# EAGLE board sirvo-breakout-shield (EAGLE 6.4)
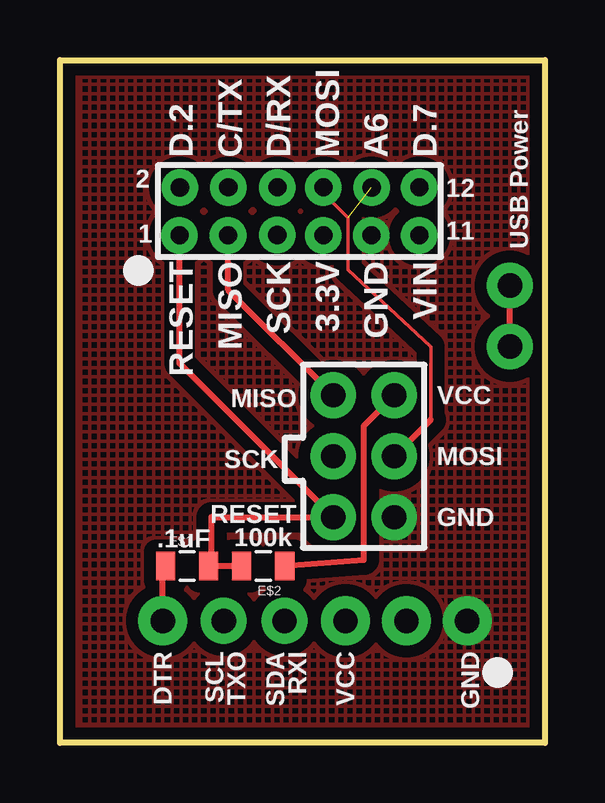
[diagram p0: board, top side]
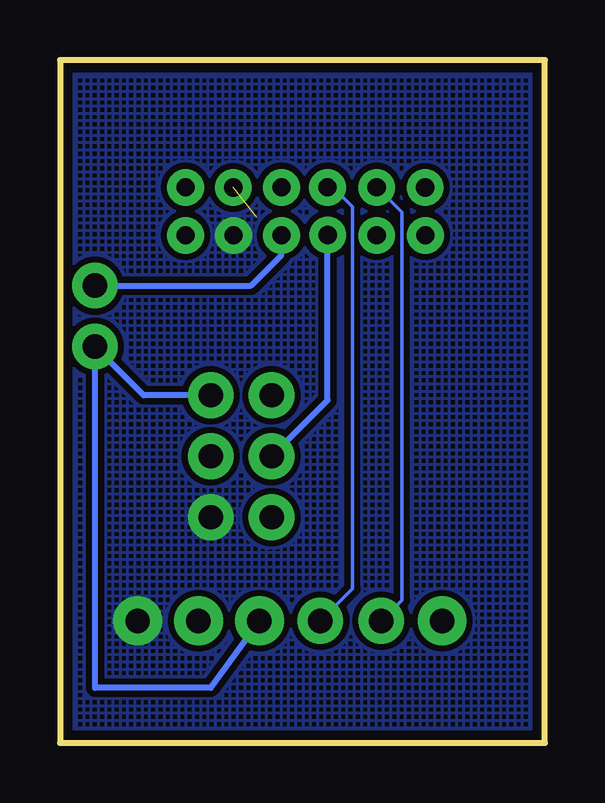
[diagram p1: board, bottom side, seen from below]

Size 20.22 x 28.45 mm. Coordinates in mm from the lower left corner, seen from the top.
Outline: 0,0 0,28.45 20.22,28.45 20.22,0 0,0
Copper layers (1*16): Top 0.0356mm / dielectric 1.5011mm / Bottom 0.0356mm
Design rules "LaenPCBOrder": minimum track width 6mil, minimum drill 13mil, track to track 6mil, track to pad 6mil, pad to pad 6mil, via to via 6mil, smd to smd 6mil, copper to edge 15mil, drill to drill 6mil, minimum pad ring 7mil, minimum via ring 7mil, stop-mask expansion 4mil, vias tented up to drill 0mil, thermal gap 10mil

## Footprints (pad centres in the part's own frame; a part is rotated, then mirrored left to right if it is on the bottom)
0805 = smd 0.8 x 1.2: 1 -0.9,0; 2 0.9,0

## Placement (x,y rotation side)
E$1  [0805]  5.3,7.37 0 top
E$2  [0805]  8.48,7.37 180 top

## Library data of the parts
E$1 E$2 = tekdemo

## Tracks (layer width: path | path; a pad name or v marks a point on that pad's centre or on a via)
3.3V  (via drill 0.76 pad 1.52, 1.02 pad 1.91, 1.02 pad 2.03)
  Top 0.254: v18.76,16.51 v18.76,19.05 | 9.37,7.37 12.67,7.62 12.67,13.21 v13.94,14.48
  Bottom 0.254: v11.91,5.08 13.94,2.29 18.76,2.29 v18.76,16.51 16.73,14.48 v13.94,14.48 | v10.99,21.14 10.99,20.32 12.26,19.05 v18.76,19.05
CTS  (via drill 1.02 pad 2.03)
  other vias: 14.45,5.08
D2  (via drill 0.76 pad 1.52)
  other vias: 5,23.14
D7  (via drill 0.76 pad 1.52)
  other vias: 14.99,23.14
DTR  (via drill 1.02 pad 2.03)
  other vias: 4.29,5.08
GND  (via drill 0.76 pad 1.52, 1.02 pad 1.91, 1.02 pad 2.03)
  other vias: 13.94,9.4 16.99,5.08 12.99,21.14
  pour Bottom (isolate 0.254, hatched): 0.1,28.32 0.1,0.13 20.03,0 20.03,28.19
  pour Top (isolate 0.508, hatched): 0.1,28.45 0.1,0 20.03,0 20.03,28.45
MISO  (via drill 0.76 pad 1.52, 1.02 pad 1.91)
  Top 0.254: v11.4,14.48 7.01,18.86 v7.01,21.14
MOSI  (via drill 0.76 pad 1.52, 1.02 pad 1.91)  (1 unrouted)
  Top 0.152: 15.46,13.46 15.46,16.51 12.01,19.71 12.01,21.87 10.99,22.89
  Top 0.254: v13.94,11.94 15.46,13.46 | 10.99,22.89 v10.99,23.14
  other vias: 13,23.14
RESET  (via drill 0.76 pad 1.52, 1.02 pad 1.91)
  Top 0.254: 7.59,7.37 6.32,7.37 6.32,9.4 v11.4,9.4 4.99,15.81 v4.99,21.14
S$1
  Top 0.254: 4.31,5.08 4.29,5.08 4.29,7.37
SCK  (via drill 0.76 pad 1.52, 1.02 pad 1.91)
  Bottom 0.254: v11.4,11.94 9.06,14.28 v9.06,21.16
SCL/TXO  (via drill 0.76 pad 1.52, 1.02 pad 1.91)
  Bottom 0.152: v6.83,5.08 5.96,5.94 5.96,22.1 v7.01,23.14
  Bottom 0.254: v7.01,23.14 v7.02,23.14
SDA/RXI  (via drill 0.76 pad 1.52, 1.02 pad 1.91)
  Bottom 0.152: v9.37,5.08 8.02,6.43 8.02,22.33 8.84,23.14
  Bottom 0.254: 8.84,23.14 v9.07,23.14
VIN  (via drill 0.76 pad 1.52)
  other vias: 14.99,21.14

## Text on the board
tPlace: D.2 / C/TX / D/RX / MOSI / A6 / D.7 | 2 | 12 | 1 | 11 | USB Power | RESET / MISO / SCK / 3.3V / GND / VIN | MISO | VCC | SCK | MOSI | RESET | GND | .1uF | 100k | DTR | SCL / TXO | SDA / RXI | VCC | GND